# EAGLE board attiny (EAGLE 9.7.0)

Size 91.87 x 37.49 mm. Coordinates in mm from the lower left corner, seen from the top.
Outline: 0,0 91.87,0 91.87,37.49 0,37.49 0,0
Copper layers (1*16): Top 0.035mm / dielectric 1.5mm / Bottom 0.035mm
Design rules "default": minimum track width 6mil, minimum drill 0.35mm, track to track 6mil, track to pad 6mil, pad to pad 6mil, via to via 6mil, smd to smd 6mil, copper to edge 40mil, drill to drill 6mil, minimum pad ring 10mil, minimum via ring 8mil, stop-mask expansion 4mil, vias tented up to drill 0mil, thermal gap 10mil

## Footprints (pad centres in the part's own frame; a part is rotated, then mirrored left to right if it is on the bottom)
LEDRD254W60D565H860B = drill 0.981 pad 1.581: 1 -1.27,0; 2 1.27,0
LEDRD254W60D565H860B_G = drill 0.981 pad 1.581: 1 -1.27,0; 2 1.27,0
LEDRD254W60D565H860B_Y = drill 0.981 pad 1.581: 1 -1.27,0; 2 1.27,0
BATTERY-GENERIC = drill 1.118 pad 3.15 octagon: + 2.54,0; - -2.54,0
RESAD1016W63L850D250B = drill 0.83 pad 1.43: 1 -5.08,0; 2 5.08,0
DIP787W55P254L958H533Q8B-8P3 = drill 0.852 pad 1.452: 1 -3.81,3.81; 2 -3.81,1.27; 3 -3.81,-1.27; 4 -3.81,-3.81; 5 3.81,-3.81; 6 3.81,-1.27; 7 3.81,1.27; 8 3.81,3.81

## Placement (x,y rotation side)
D1  RED  [LEDRD254W60D565H860B]  70,29.58 180 top
D2  GREEN  [LEDRD254W60D565H860B_G]  84.27,23.75 180 top
D3  YELLOW  [LEDRD254W60D565H860B_Y]  76.84,27.22 180 top
P1  BATTERYGENERIC  [BATTERY-GENERIC]  8.26,11.48 180 top
R1  330  [RESAD1016W63L850D250B]  71.27,24.5 90 top
R2  330  [RESAD1016W63L850D250B]  78.11,22.14 90 top
R3  330  [RESAD1016W63L850D250B]  85.54,18.67 90 top
U1  ATtiny25-20PU  [DIP787W55P254L958H533Q8B-8P3]  42.47,8.59 90 top

## Library data of the parts
D1 = Tinkercad; CATEGORY: Opto-Electronic; SUB-CATEGORY: LED; VALUE: LED_RED
D2 = Tinkercad; CATEGORY: Opto-Electronic; SUB-CATEGORY: LED; VALUE: LED_GREEN
D3 = Tinkercad; CATEGORY: Opto-Electronic; SUB-CATEGORY: LED; VALUE: LED_YELLOW
P1 R1-R3 = Tinkercad
U1 = Tinkercad; CATEGORY: IC_Embedded; CORE: AVR; DESCRIPTION: AVR AVR® ATtiny, Functional Safety (FuSa) Microcontroller IC 8-Bit 20MHz 2KB (1K x 16) FLASH 8-PDIP; MANUFACTURER: Microchip Technology; MPN: ATtiny25-20PU; OPERATING_TEMP: -40°C to 85°C; PART_STATUS: Active; ROHS_COMPLIANT: COMPLIANT; SERIES: ATtiny25; SPEED: 20 MHz; SUB-CATEGORY: Microcontroller; TYPE: AVR Microcontroller

## Nets
D1_A: D1.1 R1.2
D2_A: D2.1 R3.2
D3_A: D3.1 R2.2
P1+: P1.+ U1.8
P1-: D1.2 D2.2 D3.2 P1.- U1.4
U1_PB0: R3.1 U1.5
U1_PB1: R2.1 U1.6
U1_PB2: R1.1 U1.7

## Tracks (layer width: path | path; a pad name or v marks a point on that pad's centre or on a via)
D1_A  (1 unrouted)
D2_A  (1 unrouted)
D3_A  (1 unrouted)
P1+  (1 unrouted)
P1-  (4 unrouted)
U1_PB0  (1 unrouted)
U1_PB1  (1 unrouted)
U1_PB2  (1 unrouted)